# Altium PCB MAKKI_ISMAIL_ESPS3_CAM.PcbDoc
Units mil, origin at the board's own origin, x right, y up, seen from the top; angles counter-clockwise.
Board outline 2454.22 x 2250 mil, 2 copper layers (Top, Bottom); 74 components, 64 nets, 285 pads, 72 vias.
Unrouted connection lines stored in the file: 1.
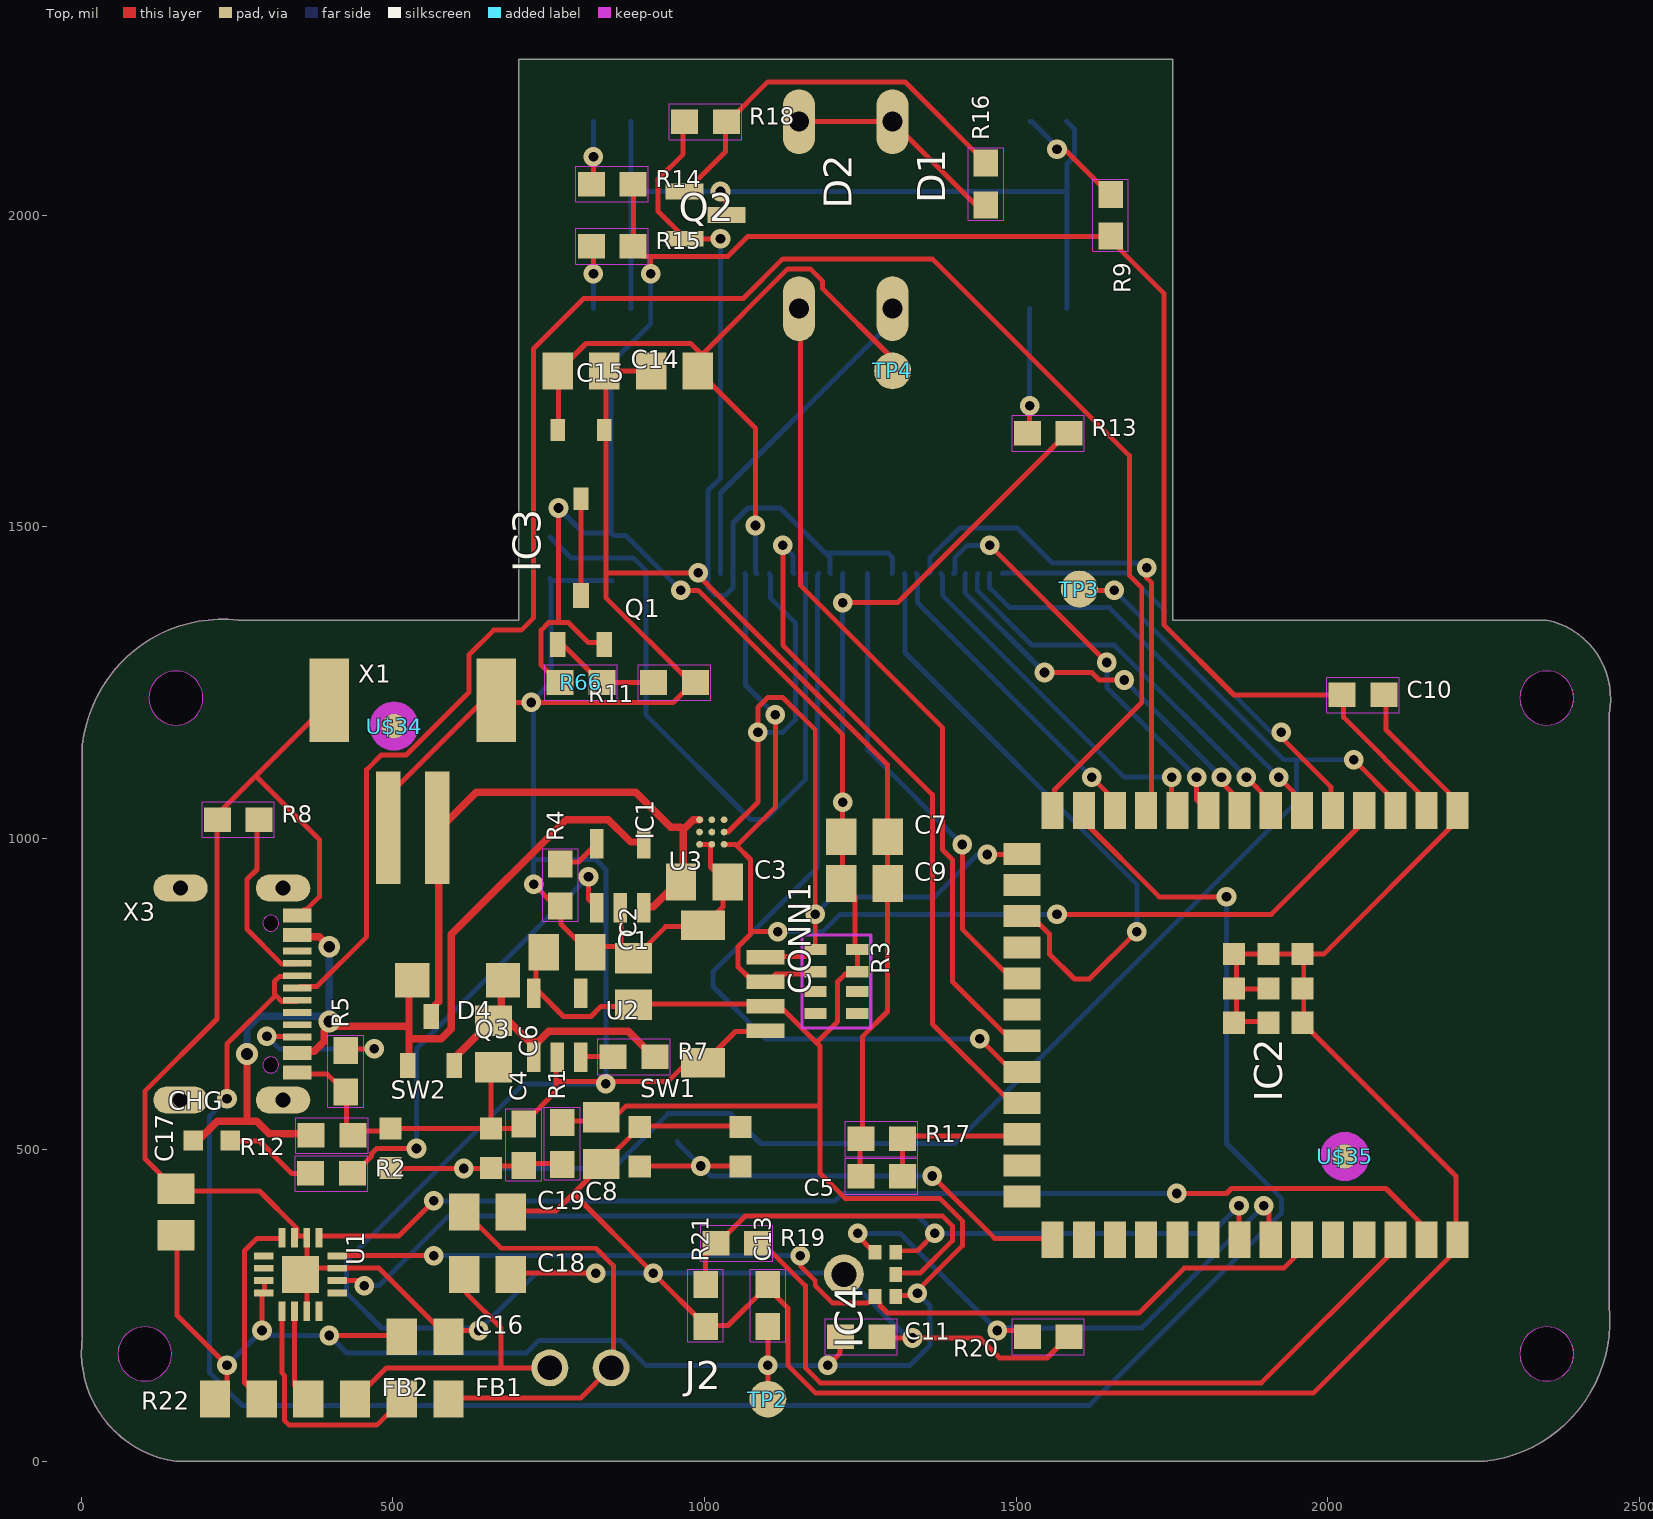
[diagram p0: Top view]
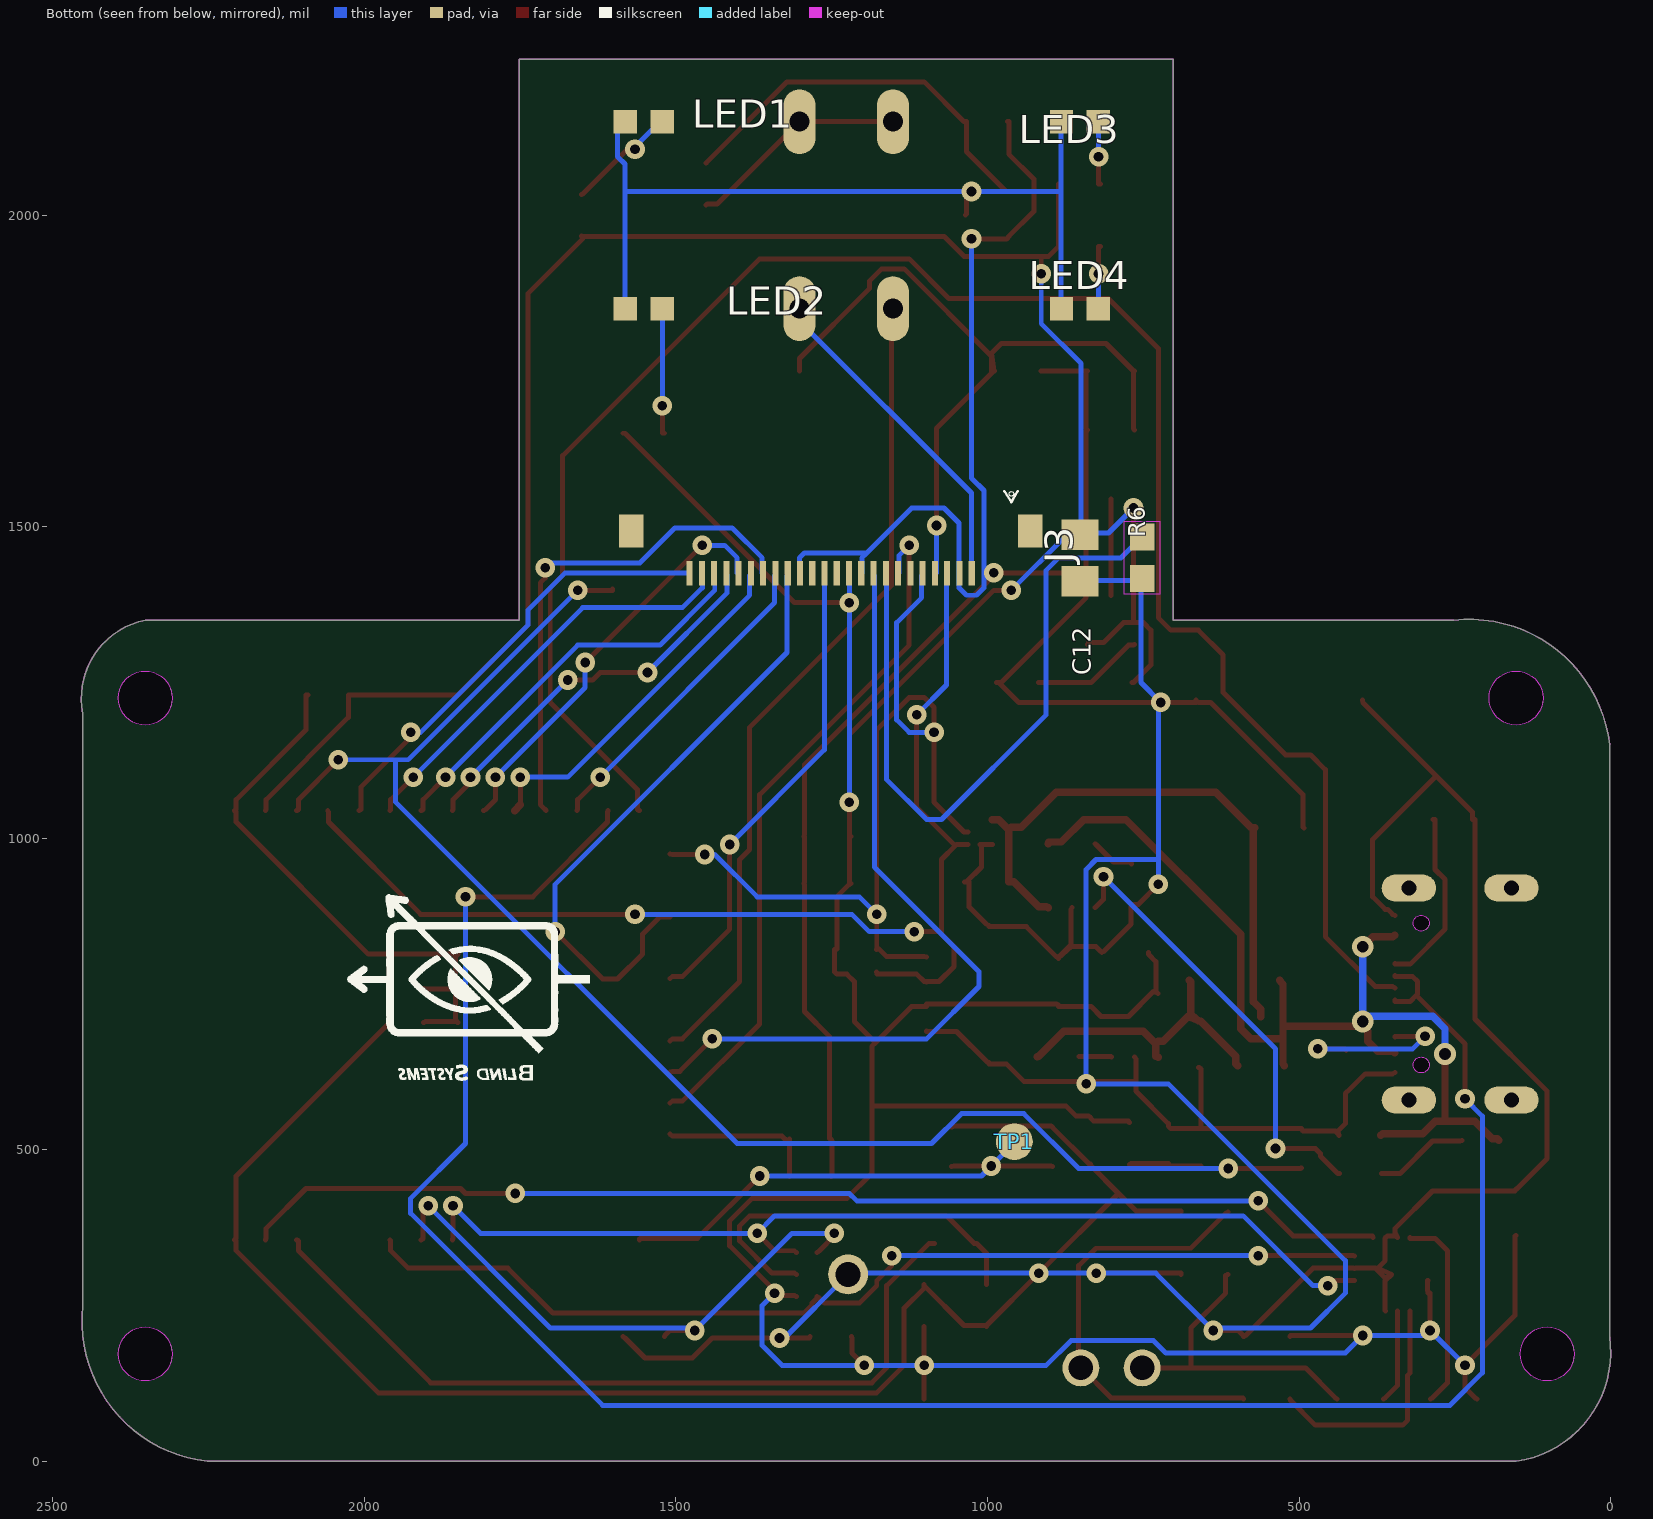
[diagram p1: Bottom view, seen from below]

## Layer stack, top to bottom
Top Solder: solder mask 0.4, Solder Resist, Dk 3.5
Top: signal copper 1.378
Dielectric 1: dielectric 12.6, FR-4, Dk 4.8
Bottom: signal copper 1.378
Bottom Solder: solder mask 0.4, Solder Resist, Dk 3.5

## Board outline
1751.78,2250 1751.78,1350 2351.78,1350 cw(c2326.78,1225) 2451.78,1200 2451.78,250 cw(c2226.78,225) 2251.78,0 151.78,0 cw(c176.78,175) 1.78,200 1.78,1150 cw(c226.78,1125) 251.78,1350 701.78,1350 701.78,2250
cut-out: 101.78,129.19 ccw(c101.78,172.5) 145.08,172.5 ccw(c101.78,172.5) 101.78,215.81 ccw(c101.78,172.5) 58.47,172.5 ccw(c101.78,172.5)
cut-out: 151.78,1181.69 ccw(c151.78,1225) 195.08,1225 ccw(c151.78,1225) 151.78,1268.31 ccw(c151.78,1225) 108.47,1225 ccw(c151.78,1225)
cut-out: 2351.78,129.19 ccw(c2351.78,172.5) 2395.08,172.5 ccw(c2351.78,172.5) 2351.78,215.81 ccw(c2351.78,172.5) 2308.47,172.5 ccw(c2351.78,172.5)
cut-out: 2351.78,1181.69 ccw(c2351.78,1225) 2395.08,1225 ccw(c2351.78,1225) 2351.78,1268.31 ccw(c2351.78,1225) 2308.47,1225 ccw(c2351.78,1225)
cut-out: 304.02,850.99 ccw(c304.02,863.78) 316.81,863.78 ccw(c304.02,863.78) 304.02,876.58 ccw(c304.02,863.78) 291.22,863.78 ccw(c304.02,863.78)
cut-out: 304.02,623.42 ccw(c304.02,636.22) 316.81,636.22 ccw(c304.02,636.22) 304.02,649.01 ccw(c304.02,636.22) 291.22,636.22 ccw(c304.02,636.22)

## Design rules (kind name [scope] priority, off if disabled: settings)
BoardOutlineClearance mdCopperDimension [All] p1: gap=10 ignorepadtopadclearanceinfootprint=FALSE except(0: Arc-SplitContinuation Track-SplitContinuation SMDPad-SplitContinuation THPad-SplitContinuation Via-SplitContinuation Fill-SplitContinuation Poly-SplitContinuation Region-SplitContinuation Text-SplitContinuation; 9: Poly-OutlineEdge Poly-CavityEdge Poly-CutoutEdge Poly-SplitBarrior)
Clearance "Clearance (Same Net)" [All] p1: gap=8 ignorepadtopadclearanceinfootprint=FALSE
Clearance [All] p2: gap=8 ignorepadtopadclearanceinfootprint=FALSE
HoleSize HoleSize_For_NetClass_Power [InNetClass('Power')] p1: absolutevalues=TRUE maxlimit=19 minlimit=19 maxpercent=80.000 minpercent=20.000
HoleSize HoleSize_For_NetClass_gnd [InNetClass('gnd')] p2: absolutevalues=TRUE maxlimit=19 minlimit=19 maxpercent=80.000 minpercent=20.000
HoleSize [All] p3: absolutevalues=TRUE maxlimit=100000 minlimit=15.5 maxpercent=80.000 minpercent=20.000
HoleToHoleClearance mdDrill [All] p1: gap=8 allowstackedmicrovias=TRUE
MinimumSolderMaskSliver [All] p1 off: minsoldermaskwidth=10
PasteMaskExpansion Expansion_SMDPaste_OFF [InPadClass('SMDPaste_OFF')] p1: expansion=0
PasteMaskExpansion mlMinCreamFrame [All] p2: expansion=0
PolygonConnect ThermalVias [IsVia] p1: connectstyle=Direct reliefconductorwidth=10 reliefentries=4 polygonreliefangle="90 Angle" airgapwidth=10
PolygonConnect [All] p2: connectstyle=Relief reliefconductorwidth=10 reliefentries=4 polygonreliefangle="90 Angle" airgapwidth=10
RoutingVias [All] p1: holewidth=15.5 width=31.5 viastyle="Through Hole" minholewidth=15.5 minwidth=31.5 maxholewidth=100 maxwidth=100
SolderMaskExpansion Expansion_SMDSolder_OFF [InPadClass('SMDSolder_OFF')] p1: expansion=0 istentingtop=FALSE
SolderMaskExpansion mlMinStopFrame [All] p2: expansion=2 istentingtop=FALSE
Width Width_For_NetClass_Power [InNetClass('Power')] p1: maxlimit=24 minlimit=10 preferedwidth=12
Width Width_For_NetClass_gnd [InNetClass('gnd')] p2: maxlimit=10 minlimit=10 preferedwidth=10
Width [All] p3: maxlimit=10 minlimit=8 preferedwidth=8
26 further rules are at their usual default settings.

## Classes and differential pairs
pad class SMDSolder_OFF: J3-1 J3-2 J3-3 J3-4 J3-5 J3-6 J3-7 J3-8 J3-9 J3-10 J3-11 J3-12 J3-13 J3-14 J3-15 J3-16 J3-17 J3-18 J3-19 J3-20 J3-21 J3-22 J3-23 J3-24 U1-1 U1-2 U1-3 U1-4 U1-5 U1-6 U1-7 U1-8 U1-9 U1-10 U1-11 U1-12 U1-13 U1-14 U1-15 U1-16
pad class SMDPaste_OFF: TP1-P$1 TP2-P$1 TP3-P$1 TP4-P$1 U1-THERMAL U$34-1 U$35-1
net class Power: VBAT VBUS VHI

## Components (designator, comment, footprint, x,y, rotation, side; value= is the part's Value field where it differs from the comment)
C1 "10uF" 0805-NO 779.28,817 r0 top
C2 "10uF" 0805-NO 886.28,770 r90 top
C3 "10µF" 0805-NO 999.78,930 r0 top
C4 "1uF" 0603-NO 709.78,508 r90 top
C5 "1uF" 0603-NO 1284.28,457.5 r180 top
C6 "10µF" 0805-NO 661.35,669.8 r270 top
C7 "10uF" 0805-NO 1256.78,1002.5 r0 top
C8 "10µF" 0805-NO 834.37,514.64 r270 top
C9 "10uF" 0805-NO 1256.78,927.5 r0 top
C10 "1uF" 0603-NO 2056.78,1230 r0 top
C11 "0.1uF" 0603-NO 1251.78,200 r0 top
C12 "100pF" 0805-NO 851.78,1450 r270 bottom
C13 "1uF" 0603-NO 1101.78,250 r90 top
C14 "10µF" 0805-NO 801.78,1750 r0 top
C15 "100pF" 0805-NO 951.78,1750 r180 top
C16 "0.1uF" 0805-NO 551.78,200 r0 top
C17 "10uF" 0805-NO 151.78,400 r90 top
C18 "220pF" 0805-NO 651.78,300 r0 top
C19 "220pF" 0805-NO 651.78,400 r0 top
CHG "ORANGE" CHIPLED_0603_NOOUTLINE 209.28,515 r270 top
CONN1 "JST SH" JST_SH4_RA 1031.78,750 r270 top
D1 "1N4148DO35-7" DO35-7 1301.78,2000 r270 top
D2 "1N4148DO35-7" DO35-7 1151.78,2000 r270 top
D4 "MBR540" SOD-123 603.78,772 r180 top
FB1 "Ferrite" 0805-NO 551.78,100 r0 top
FB2 "Ferrite" 0805-NO 401.78,100 r0 top
IC1 "LC709203F/MH" WLCSP9 1011.78,1010 r90 top
IC2 "ESP32-S3-WROOM-1-N16R8" ESP32S3WROOM1N16R8 2001.78,700 r270 top
IC3 "XC6206P282MR-G" SOT95P280X130-3N 801.78,1600 r270 top
IC4 "" SPH0645LM4H 1251.78,300 r270 top
J2 "B2B-XH-A" B2B-XH-A 751.78,150 r0 top
J3 "XF2L-2435-1" XF2L-2435-1 1251.78,1500 r270 bottom
LED1 "150060SS75000" LEDC1608X80N 1551.78,2150 r180 bottom
LED2 "150060SS75000" LEDC1608X80N 1551.78,1850 r180 bottom
LED3 "150060SS75000" LEDC1608X80N 851.78,2150 r180 bottom
LED4 "150060SS75000" LEDC1608X80N 851.78,1850 r180 bottom
Q1 "DMG3415U" SOT23-R 801.78,1350 r0 top
Q2 "2N7002" SOT96P240X120-3N 1001.78,2000 r0 top
Q3 "DMG3415U" SOT23-R 561.28,674.5 r0 top
R1 "5.1K" 0603-NO 771.78,510 r90 top
R2 "5.1K" 0603-NO 401.28,462 r0 top
R3 "10K" RESPACK_4X0603 1211.78,770 r270 top
R4 "5.1K" 0603-NO 768.78,925 r90 top
R5 "5.1K" 0603-NO 424.28,626 r90 top
R6 "1K" 0603-NO 751.78,1450 r90 bottom
R7 "100K" 0603-NO 886.78,649.5 r0 top
R8 "5.1K" 0603-NO 251.78,1030 r0 top
R9 "0.12 K" 0603-NO 1651.78,2000 r270 top
R11 "1K" 0603-NO 951.78,1250 r180 top
R12 "100K" 0603-NO 402.28,523 r180 top
R13 "0.12 K" 0603-NO 1551.78,1650 r0 top
R14 "0.12 K" 0603-NO 851.78,2050 r0 top
R15 "0.12 K" 0603-NO 851.78,1950 r0 top
R16 "1K" 0603-NO 1451.78,2050 r90 top
R17 "1Meg" 0603-NO 1284.28,517.5 r0 top
R18 "1K" 0603-NO 1001.78,2150 r0 top
R19 "68" 0603-NO 1051.78,350 r0 top
R20 "47K" 0603-NO 1551.78,200 r180 top
R21 "47K" 0603-NO 1001.78,250 r90 top
R22 "1M" 0805-NO 251.78,100 r180 top
R66 "10K" 0603-NO 801.78,1250 r180 top
SW1 "KMR2" BTN_KMR2_4.6X2.8 976.78,505 r0 top
SW2 "KMR2" BTN_KMR2_4.6X2.8 576.78,502.5 r0 top
TP1 "" TESTPOINT_ROUND_1.5MM_NO 956.78,513 r180 bottom
TP2 "" TESTPOINT_ROUND_1.5MM_NO 1101.78,100 r0 top
TP3 "" TESTPOINT_ROUND_1.5MM_NO 1601.78,1400 r0 top
TP4 "" TESTPOINT_ROUND_1.5MM_NO 1301.78,1750 r0 top
U1 "MAX98357A" QFN16_3MM 351.78,300 r270 top
U2 "AP2112/RT9080-3.3" SOT23-5 763.78,700 r0 top
U3 "MCP73831T-2ACI/OT" SOT23-5 864.78,940 r0 top
U$34 "" FIDUCIAL_1MM 501.78,1180 r270 top
U$35 "" FIDUCIAL_1MM 2027.64,489.28 r270 top
X1 "JSTPH" JSTPH2_BATT 531.78,1162.5 r0 top
X3 "USB C" USB_C_CUSB31-CFM2AX-01-X 206.78,750 r270 top

## Footprints (in the part's own frame and the unit in brackets; to place one, negate y for a bottom-side part, rotate by r counter-clockwise, add the part's x,y. Pads: shape width x height; smd on the part's side, far side on the other; paste and mask are expansions set on the pad)
0603-NO [mm] "0603-NO"
  rect 1.1x1 smd: 1(-0.85,0) 2(0.85,0)
  Top keep-out lines w0.051: -1.473,0.729 -1.473,-0.729 1.473,-0.729 1.473,0.729 -1.473,0.729
0805-NO [mil] "0805-NO"
  rect 48.82x59.06 smd: 1(-37.4,0) 2(37.4,0)
B2B-XH-A [mm] "B2B-XH-A"
  round 1.508 hole 1: 1(0,0) 2(2.5,0)
BTN_KMR2_4.6X2.8 [mil] "BTN_KMR2_4.6X2.8"
  rect 35.43x35.43 smd: A(80.71,31.5) A'(-80.71,31.5) B(80.71,-31.5) B'(-80.71,-31.5)
CHIPLED_0603_NOOUTLINE [mil] "CHIPLED_0603_NOOUTLINE"
  rect 31.5x31.5 smd: A(0,-29.53) C(0,29.53)
DO35-7 [mil] "DO35-7"
  oval 104x52 hole 32: A(150,0) C(-150,0)
ESP32S3WROOM1N16R8 [mm] "ESP32S3WROOM1N16R8"
  rect 1.5x0.9 smd: 1(-8.75,5.26) 2(-8.75,3.99) 3(-8.75,2.72) 4(-8.75,1.45) 5(-8.75,0.18) 6(-8.75,-1.09) 7(-8.75,-2.36) 8(-8.75,-3.63) 9(-8.75,-4.9) 10(-8.75,-6.17) 11(-8.75,-7.44) 12(-8.75,-8.71) 13(-8.75,-9.98) 14(-8.75,-11.25) 27(8.75,-11.25) 28(8.75,-9.98) 29(8.75,-8.71) 30(8.75,-7.44) 31(8.75,-6.17) 32(8.75,-4.9) 33(8.75,-3.63) 34(8.75,-2.36) 35(8.75,-1.09) 36(8.75,0.18) 37(8.75,1.45) 38(8.75,2.72) 39(8.75,3.99) 40(8.75,5.26)
  rect 0.9x1.5 smd: 15(-6.985,-12.5) 16(-5.715,-12.5) 17(-4.445,-12.5) 18(-3.175,-12.5) 19(-1.905,-12.5) 20(-0.635,-12.5) 21(0.635,-12.5) 22(1.905,-12.5) 23(3.175,-12.5) 24(4.445,-12.5) 25(5.715,-12.5) 26(6.985,-12.5)
  rect 0.9x0.9 smd: 41(-1.5,-2.46) 42(-2.9,-1.06) 43(-2.9,-2.46) 44(-2.9,-3.86) 45(-1.5,-3.86) 46(-0.1,-3.86) 47(-0.1,-2.46) 48(-0.1,-1.06) 49(-1.5,-1.06)
FIDUCIAL_1MM [mm] "FIDUCIAL_1MM"
  rrect100% 1x1 smd paste+0: 1(0,0)
  Top keep-out lines w0.483: 0,-0.75 cw(c0,0) -0.75,0 cw(c0,0) 0,0.75 cw(c0,0) 0.75,0 cw(c0,0) 0,-0.75
  Top keep-out lines w0.5: 0,-0.75 cw(c0,0) -0.75,0 cw(c0,0) 0,0.75 cw(c0,0) 0.75,0 cw(c0,0) 0,-0.75
JST_SH4_RA [mil] "JST_SH4_RA"
  rect 23.62x61.02 smd: 1(59.06,66.38) 2(19.69,66.38) 3(-19.69,66.38) 4(-59.06,66.38)
  rect 47.24x70.87 smd: MT1(-110.24,-33.94) MT2(110.24,-33.94)
JSTPH2_BATT [mm] "JSTPH2_BATT"
  rect 1x4.6 smd: 1(-1,-3.7) 2(1,-3.7)
  rect 1.6x3.4 smd: NC1(-3.4,1.5) NC2(3.4,1.5)
LEDC1608X80N [mil] "LEDC1608X80N"
  rect 37.4x37.4 smd: 1(-29.53,0) 2(29.53,0)
QFN16_3MM [mil] "QFN16_3MM"
  rect 31.5x11.02 smd mask+0: 1(-59.06,29.53) 2(-59.06,9.84) 3(-59.06,-9.84) 4(-59.06,-29.53) 9(59.06,-29.53) 10(59.06,-9.84) 11(59.06,9.84) 12(59.06,29.53)
  rect 11.02x31.5 smd mask+0: 5(-29.53,-59.06) 6(-9.84,-59.06) 7(9.84,-59.06) 8(29.53,-59.06) 13(29.53,59.06) 14(9.84,59.06) 15(-9.84,59.06) 16(-29.53,59.06)
  rect 59.06x59.06 smd paste+0: THERMAL(0,0)
RESPACK_4X0603 [mil] "RESPACK_4X0603"
  rect 17.72x35.43 smd: 1(-51.18,-33.46) 2(-15.75,-33.46) 3(15.75,-33.46) 4(51.18,-33.46) 5(51.18,33.46) 6(15.75,33.46) 7(-15.75,33.46) 8(-51.18,33.46)
  Top keep-out lines w5: 74.8,-55.12 -74.8,-55.12 -74.8,55.12 74.8,55.12 74.8,-55.12
SOD-123 [mil] "SOD-123"
  rect 55.12x55.12 smd: A(72.83,0) C(-72.83,0)
SOT23-5 [mil] "SOT23-5"
  rect 21.65x47.24 smd: 1(-37.4,-51.19) 2(0,-51.19) 3(37.4,-51.19) 4(37.4,51.19) 5(-37.4,51.19)
SOT23-R [mil] "SOT23-R"
  rect 25x40 smd: 1(-37.4,-39.37) 2(37.4,-39.37) 3(0,39.37)
SOT95P280X130-3N [mil] "SOT95P280X130-3N"
  rect 35.43x23.62 smd: 1(-55.12,37.4) 2(-55.12,-37.4) 3(55.12,0)
SOT96P240X120-3N [mm] "SOT96P240X120-3N"
  rect 1.55x0.65 smd: 1(-0.85,0.96) 2(-0.85,-0.96) 3(0.85,0)
SPH0645LM4H [mm] "SPH0645LM4H"
  rect 0.6x0.525 smd: 1(-0.9,1.4) 2(-0.9,0.55) 4(0.9,0.55) 5(0.9,1.4) 6(0,1.4)
  round 1.625 hole 1.025: 3(0,-0.71)
TESTPOINT_ROUND_1.5MM_NO [mil] "TESTPOINT_ROUND_1.5MM_NO"
  rrect100% 59.06x59.06 smd paste+0: P$1(0,0)
USB_C_CUSB31-CFM2AX-01-X [mil] "USB_C_CUSB31-CFM2AX-01-X"
  rect 22.64x45.28 smd: A1B12(-125.98,139.57) A4B9(-94.49,139.57) B1A12(125.98,139.57) B4A9(94.49,139.57)
  rect 10.83x45.28 smd: A5(-49.21,139.57) A6(-9.84,139.57) A7(9.84,139.57) A8(49.21,139.57) B5(68.9,139.57) B6(29.53,139.57) B7(-29.53,139.57) B8(-68.9,139.57)
  oval 43.62x87.24 hole 23.62: M1(-170.08,116.93) M2(170.08,116.93) M3(-170.08,-47.64) M4(170.08,-47.64)
WLCSP9 [mil] "WLCSP9"
  rrect100% 10.83x10.83 smd: A1(-19.69,19.69) A2(0,19.69) A3(19.69,19.69) B1(-19.69,0) B2(0,0) B3(19.69,0) C1(-19.69,-19.69) C2(0,-19.69) C3(19.69,-19.69)
XF2L-2435-1 [mm] "XF2L-2435-1"
  rect 1x0.25 smd mask+0: 1(1.905,5.75) 2(1.905,5.25) 3(1.905,4.75) 4(1.905,4.25) 5(1.905,3.75) 6(1.905,3.25) 7(1.905,2.75) 8(1.905,2.25) 9(1.905,1.75) 10(1.905,1.25) 11(1.905,0.75) 12(1.905,0.25) 13(1.905,-0.25) 14(1.905,-0.75) 15(1.905,-1.25) 16(1.905,-1.75) 17(1.905,-2.25) 18(1.905,-2.75) 19(1.905,-3.25) 20(1.905,-3.75) 21(1.905,-4.25) 22(1.905,-4.75) 23(1.905,-5.25) 24(1.905,-5.75)
  rect 1.34x1 smd: M1(0.18,8.137) M2(0.18,-8.137)
  silkscreen extent -1.44,7.08 -1,7.62

## Part data
C1 C2 C3 C6 C7 C8 C9 C12 C14 C15 C16 C17 C18 C19 FB1 FB2 R22: library part 0805-NO, PackageName=0805-NO
C4 C5 C10 C11 C13 R1 R2 R4 R5 R6 R7 R8 R9 R11 R12 R13 R14 R15 R16 R17 R18 R19 R20 R21 R66: library part 0603-NO, PackageName=0603-NO
CHG: library part CHIPLED_0603_NOOUTLINE, PackageName=CHIPLED_0603_NOOUTLINE
CONN1: library part JST_SH4_RA, PackageName=JST_SH4_RA
D1 D2: library part DO35-7, PackageName=DO35-7
D4: library part SOD-123, PackageName=SOD-123
IC1: library part WLCSP9, PackageName=WLCSP9
IC2: library part ESP32S3WROOM1N16R8, PackageName=ESP32S3WROOM1N16R8
IC3: library part SOT95P280X130-3N, PackageName=SOT95P280X130-3N
IC4: library part SPH0645LM4H, PackageName=SPH0645LM4H
LED1 LED2 LED3 LED4: library part LEDC1608X80N, PackageName=LEDC1608X80N
Q1 Q3: library part SOT23-R, PackageName=SOT23-R
Q2: library part SOT96P240X120-3N, PackageName=SOT96P240X120-3N
R3: library part RESPACK_4X0603, PackageName=RESPACK_4X0603
SW1 SW2: library part BTN_KMR2_4.6X2.8, PackageName=BTN_KMR2_4.6X2.8
TP1 TP2 TP3 TP4: library part TESTPOINT_ROUND_1.5MM_NO, PackageName=TESTPOINT_ROUND_1.5MM_NO
U1: library part QFN16_3MM, PackageName=QFN16_3MM
U2 U3: library part SOT23-5, PackageName=SOT23-5
U$34 U$35: library part FIDUCIAL_1MM, PackageName=FIDUCIAL_1MM
X1: library part JSTPH2_BATT, PackageName=JSTPH2_BATT
X3: library part USB_C_CUSB31-CFM2AX-01-X, PackageName=USB_C_CUSB31-CFM2AX-01-X
J2: PackageName=B2B-XH-A
J3: PackageName=XF2L-2435-1

## Free pads (board coordinates)
  round 25.59 hole 25.59 unplated: MH1(304.02,636.22) MH2(304.02,863.78)
  round 86.61 hole 86.61 unplated: MH1(2351.78,172.5) MH2(2351.78,1225) MH3(101.78,172.5) MH4(151.78,1225)

## Via types
v1: diameter 31.5/31.5 (per signal layer), hole 15.5, Top to Bottom, 69 vias
v2: diameter 35/35 (per signal layer), hole 19, Top to Bottom, 3 vias

## Nets (pads, with @x,y where several pads share a name; then routed paths per layer and width w, separated by ;. In a path a pad name is that pad's centre, name@x,y a point inside that pad or via, vN(x,y) a via of type N, cw(c..) or ccw(c..) an arc to the next point about the centre after c; other vN are vias at no path point)
1.8V: IC2.25
2.8V: C14.1 C15.1 IC3.2 J3.4 TP4.P$1 | length 1224.7
  Top w8: IC3.2 765.78,1658 C14.1@765.78,1750 ; C14.1 C14.1@765.78,1750 ; v1(1081.78,1502) 1081.78,1658 989.78,1750 C15.1 ; TP4.P$1 1301.78,1770 1189.78,1882 1189.78,1894 1169.78,1914 1133.78,1914 993.78,1774 993.78,1750 C15.1 ; C14.1@765.78,1750 809.78,1794 977.78,1794 993.78,1778 C15.1
  Bottom w8: v1(1081.78,1502) 1081.78,1426 J3.4
3.3V: C1.1 C2.1 C7.1 C8.1 C9.1 C10.1 C11.1 C12.1 C13.1 C16.1 C17.1 CONN1.2 IC2.2 IC4.5 J3.11 Q1.2 R1.2 R3.7 R3.8 R9.2 R13.2 R14.2 R15.2 R22.2 R66.2 TP2.P$1 U1.7 U1.8 U2.5 | length 8642.3
  Top w8: C17.1 153.78,362 153.78,234 v1(233.78,154) 233.78,118 217.78,102 R22.2 ; v1(289.78,210) 289.78,270 U1.8 293.78,274 293.78,290 U1.7 ; v1(397.78,202) 513.78,202 C16.1 ; C1.1 741.78,814 729.78,802 729.78,754 U2.5 733.78,754 773.78,714 817.78,714 833.78,730 885.78,730 C2.1 889.78,734 1097.78,734 CONN1.2 1101.78,730 1121.78,730 1179.78,672 ; v1(765.78,1530) 765.78,1346 ; R66.2 765.78,1250 737.78,1278 737.78,1334 749.78,1346 765.78,1346 ; R1.2 773.78,546 829.78,546 833.78,550 C8.1 837.78,554 857.78,554 873.78,570 1185.78,570 ; Q1.2 837.78,1314 813.78,1314 781.78,1346 765.78,1346 ; R15.2 R15.2@885.78,1950 ; R14.2 885.78,2050 R15.2@885.78,1950 ; v1(913.78,1906) 913.78,1934 ; v1(961.78,1398) 989.78,1398 1221.78,1166 v1(1221.78,1058) 1221.78,1006 C7.1 1221.78,1002 1221.78,930 C9.1 1221.78,926 1241.78,906 1241.78,822 R3.8 1245.78,818 1245.78,786 R3.7 1241.78,782 1225.78,782 1213.78,770 1213.78,706 1179.78,672 ; TP2.P$1 v1(1101.78,154) C13.1 ; v1(1197.78,154) 1217.78,174 1217.78,198 C11.1 ; v1(1221.78,1378) 1309.78,1378 1581.78,1650 R13.2 ; IC4.5 1309.78,266 1333.78,266 v1@1339.78,272 ; v1(1341.78,270) v1@1339.78,272 ; IC2.2 2157.78,1046 2157.78,1062 2025.78,1194 2025.78,1230 C10.1 1849.78,1230 1737.78,1342 1737.78,1874 1649.78,1962 R9.2 1649.78,1966 1069.78,1966 1037.78,1934 913.78,1934 ; R15.2@885.78,1950 901.78,1934 913.78,1934 ; 1179.78,672 1185.78,666 1185.78,570 ; 1185.78,570 1185.78,462 1225.78,422 1377.78,422 1413.78,386 1413.78,346 v1@1339.78,272
  Bottom w8: v1(233.78,154) v1(289.78,210) 285.78,202 v1(397.78,202) 425.78,174 713.78,174 733.78,194 865.78,194 905.78,154 v1(1101.78,154) v1(1197.78,154) 1329.78,154 1361.78,186 1361.78,250 v1(1341.78,270) ; v1(765.78,1530) 805.78,1490 849.78,1490 C12.1 ; v1(913.78,1906) 913.78,1826 849.78,1762 849.78,1494 C12.1 ; v1(961.78,1398) 873.78,1486 853.78,1486 C12.1 ; v1(1221.78,1058) v1(1221.78,1378) 1221.78,1422 J3.11
BCLK: IC2.35 IC4.4 U1.16 | length 1670.5
  Top w8: U1.16 413.78,330 v1(565.78,330) ; v1(1153.78,330) 1153.78,314 1177.78,290 1177.78,282 1205.78,254 1261.78,254 1269.78,262 IC4.4 1273.78,262 1281.78,254 1281.78,250 1293.78,238 1697.78,238 1769.78,310 1929.78,310 1957.78,338 1957.78,354 IC2.35
  Bottom w8: v1(565.78,330) v1(1153.78,330)
BOOT0: IC2.27 SW1.B SW1.B' TP1.P$1 | length 830.4
  Top w8: SW1.B' 897.78,474 v1(993.78,474) 1053.78,474 SW1.B ; v1(1365.78,458) 1465.78,358 1557.78,358 IC2.27
  Bottom w8: TP1.P$1 957.78,510 v1(993.78,474) 1009.78,458 v1(1365.78,458)
COMMAND: D2.A IC2.21 | length 1334.1
  Top w8: D2.A 1153.78,1850 1153.78,1406 1381.78,1178 1381.78,982 1397.78,966 1397.78,770 1489.78,678 1505.78,678 IC2.21
D0: IC2.5 J3.24 | length 728.4
  Top w8: v1(1925.78,1170) 1925.78,1162 2005.78,1082 2005.78,1046 IC2.5
  Bottom w8: J3.24 1481.78,1426 1677.78,1426 1737.78,1366 1737.78,1342 1909.78,1170 v1(1925.78,1170)
D1: IC2.6 J3.23 | length 681.8
  Top w8: v1(1921.78,1098) 1957.78,1062 1957.78,1046 IC2.6
  Bottom w8: J3.23 1457.78,1422 1457.78,1402 1489.78,1370 1649.78,1370 v1(1921.78,1098)
D2: IC2.10 J3.19 | length 581.9
  Top w8: IC2.10@1749.78,1054 v1(1749.78,1098)
  Top w12: IC2.10@1749.78,1054 1749.78,1053.57 IC2.10
  Bottom w8: J3.19 1381.78,1422 1381.78,1390 1673.78,1098 v1(1749.78,1098)
D3: IC2.8 J3.21 | length 631.3
  Top w8: v1(1545.78,1266) 1621.78,1266 1633.78,1254 v1(1673.78,1254) ; v1(1829.78,1098) 1829.78,1090 1857.78,1062 1857.78,1046 IC2.8
  Bottom w8: J3.21 1417.78,1422 1417.78,1394 v1(1545.78,1266) ; v1(1673.78,1254) v1(1829.78,1098)
D4: IC2.7 J3.22 | length 653.8
  Top w8: v1(1869.78,1098) 1905.78,1062 1905.78,1046 IC2.7
  Bottom w8: J3.22 1437.78,1422 1437.78,1398 1525.78,1310 1657.78,1310 v1(1869.78,1098)
D5: IC2.9 J3.20 | length 662.4
  Top w8: v1(1457.78,1470) v1(1645.78,1282) ; v1(1789.78,1098) 1789.78,1062 1805.78,1046 IC2.9
  Bottom w8: J3.20 1401.78,1426 1401.78,1450 1421.78,1470 v1(1457.78,1470) ; v1(1645.78,1282) 1645.78,1242 v1(1789.78,1098)
D6: IC2.11 J3.18 | length 816.8
  Top w8: IC2.11 1709.78,1046 1717.78,1054 1717.78,1410 1709.78,1418 v1(1709.78,1434)
  Bottom w8: J3.18 1361.78,1426 1361.78,1450 1409.78,1498 1501.78,1498 1557.78,1442 1701.78,1442 v1(1709.78,1434)
D7: IC2.17 J3.16 | length 1005.9
  Top w8: IC2.17 1509.78,874 1525.78,874 1553.78,846 1553.78,814 1593.78,774 1617.78,774 v1(1693.78,850)
  Bottom w8: J3.16 1321.78,1422 1321.78,1298 1693.78,926 v1(1693.78,850)
D8: IC2.18
D9: IC2.20
D+: IC2.14 X3.A6 X3.B6 | length 3033.5
  Top w8: X3.A6 349.78,762 377.78,762 457.78,842 457.78,1110 481.78,1134 521.78,1134 621.78,1234 621.78,1294 661.78,1334 705.78,1334 725.78,1354 725.78,1786 805.78,1866 1061.78,1866 1125.78,1930 1365.78,1930 1681.78,1614 1681.78,1422 1701.78,1402 1701.78,1218 1561.78,1078 1561.78,1046 IC2.14
D-: IC2.13 X3.A7 X3.B7 | length 3464
  Top w8: v1(233.78,582) 233.78,670 311.78,748 ; X3.A7 345.78,738 321.78,738 311.78,748 ; X3.B7 345.78,778 317.78,778 309.78,770 309.78,750 311.78,748 ; IC2.13 1609.78,1042 1609.78,1026 1729.78,906 v1(1837.78,906)
  Bottom w8: v1(233.78,582) 205.78,554 205.78,142 257.78,90 1617.78,90 1925.78,398 1925.78,422 1837.78,510 v1(1837.78,906)
DATA: IC2.38 R19.2 | length 1297.9
  Top w8: R19.2 1093.78,350 1161.78,282 1161.78,150 1185.78,126 1893.78,126 2105.78,338 2105.78,354 IC2.38
DIN: IC2.39 U1.1 | length 1855.7
  Top w8: U1.1 381.78,362 509.78,362 v1(565.78,418) ; v1(1757.78,430) 1837.78,430 1845.78,438 2093.78,438 2157.78,374 2157.78,358 IC2.39
  Bottom w8: v1(565.78,418) 1209.78,418 1221.78,430 v1(1757.78,430)
EN: R7.1 U2.3 | length 52.9
  Top w8: U2.3 801.78,650 849.78,650 R7.1
GND: C1.2 C2.2 C3.2 C4.2 C5.2 C6.2 C7.2 C8.2 C9.2 C10.2 C11.2 C12.2 C13.2 C14.2 C15.2 C16.2 C17.2 C18.2 C19.2 CONN1.1 CONN1.MT1 CONN1.MT2 IC1.A1 IC1.B1 IC2.1 IC2.40 IC2.41 IC2.42 IC2.43 IC2.44 IC2.45 IC2.46 IC2.47 IC2.48 IC2.49 IC3.1 IC4.3 J3.2 J3.10 J3.15 Q2.2 R4.1 R5.1 R6.1 R8.1 R11.1 R12.1 R17.1 R18.1 R20.1 R21.1 SW1.A SW1.A' SW2.A SW2.A' U1.2 U1.3 U1.11 U1.15 U1.THERMAL U2.2 U3.2 X1.1 X1.NC1 X1.NC2 X3.A1B12 X3.B1A12 | length 14408.7
  Top w8: X3.B1A12 349.78,622 393.78,622 421.78,594 R5.1 425.78,590 425.78,542 437.78,530 R12.1 437.78,526 441.78,530 493.78,530 SW2.A' 497.78,534 653.78,534 SW2.A ; X3.A1B12 349.78,878 357.78,886 361.78,886 381.78,906 381.78,998 279.78,1100 ; U1.11 361.78,242 361.78,290 U1.THERMAL ; X1.NC1 397.78,1218 279.78,1100 ; X1.1 493.78,1018 493.78,1070 641.78,1218 661.78,1218 X1.NC2 665.78,1218 v1(721.78,1218) 949.78,1218 981.78,1250 R11.1 977.78,1250 841.78,1386 841.78,1426 ; v1(637.78,210) 597.78,210 589.78,202 C16.2 585.78,202 477.78,310 413.78,310 U1.15 409.78,310 401.78,310 377.78,310 361.78,294 U1.THERMAL ; C6.2 657.78,630 657.78,538 SW2.A ; C18.2 689.78,302 v1(825.78,302) ; C19.2 689.78,402 761.78,402 789.78,430 ; v1(725.78,926) 757.78,894 765.78,894 R4.1 769.78,890 769.78,862 813.78,818 C1.2 817.78,818 825.78,826 865.78,826 C2.2 ; U2.2 761.78,646 761.78,610 ; C14.2 C14.2@841.78,1750 ; v1(841.78,606) v1@841.78,610 ; U3.2 865.78,886 865.78,830 885.78,810 C2.2 ; C15.2 C14.2@841.78,1750 ; R18.1 965.78,2150 965.78,2098 925.78,2058 925.78,2006 965.78,1966 Q2.2 969.78,1962 v1(1025.78,1962) ; v1(989.78,1426) v1@987.78,1424 ; IC1.A1 993.78,990 1009.78,990 IC1.B1 1009.78,986 1009.78,954 1033.78,930 C3.2 1029.78,930 1029.78,890 1001.78,862 CONN1.MT1 997.78,858 937.78,858 889.78,810 C2.2 ; R21.1 R21.1@1001.78,218 ; SW1.A 1053.78,538 897.78,538 SW1.A' 893.78,534 837.78,478 C8.2 833.78,474 789.78,430 ; CONN1.1 1097.78,690 1049.78,690 1001.78,642 CONN1.MT2 997.78,638 969.78,638 941.78,610 v1@841.78,610 ; C5.2 1249.78,458 1249.78,514 R17.1 1253.78,518 1253.78,682 1293.78,722 1293.78,926 C9.2 1293.78,930 1293.78,1002 C7.2 1293.78,1006 1293.78,1118 v1@987.78,1424 ; C11.2 1285.78,198 v1(1333.78,198) 1441.78,198 1473.78,166 1549.78,166 1581.78,198 R20.1 ; IC2.47 1901.78,706 1853.78,706 IC2.46 1853.78,710 1853.78,754 IC2.45 ; IC2.41 1901.78,758 1853.78,758 IC2.45 ; C10.2 2093.78,1230 2093.78,1174 2205.78,1062 2205.78,1046 IC2.1 2205.78,1042 2205.78,1026 1993.78,814 1965.78,814 IC2.42 ; 279.78,1100 221.78,1042 221.78,1030 R8.1 217.78,1030 217.78,710 101.78,594 101.78,486 149.78,438 C17.2 153.78,434 285.78,434 345.78,374 345.78,366 U1.3 345.78,362 357.78,362 U1.2 361.78,358 361.78,322 373.78,310 U1.THERMAL ; SW2.A 657.78,534 705.78,534 709.78,538 C4.2 709.78,542 761.78,594 761.78,610 ; 761.78,610 v1@841.78,610 ; 789.78,430 v1(917.78,302) R21.1@1001.78,218 ; 841.78,1426 985.78,1426 v1@987.78,1424 ; 841.78,1426 841.78,1654 IC3.1 841.78,1658 C14.2@841.78,1750 ; R21.1@1001.78,218 1037.78,218 1101.78,282 C13.2 1101.78,278 1133.78,246 1133.78,154 1177.78,110 1977.78,110 2205.78,338 2205.78,354 IC2.40 2205.78,358 2205.78,458 1961.78,702 IC2.48 1961.78,706 1961.78,758 IC2.49 1961.78,762 1961.78,814 IC2.42 ; IC2.45 1853.78,762 1853.78,810 IC2.44 1853.78,814 1901.78,814 IC2.43 1905.78,814 1957.78,814 IC2.42
  Bottom w8: v1(725.78,926) 725.78,966 ; C12.2 849.78,1414 753.78,1414 R6.1 753.78,1410 753.78,1250 v1(721.78,1218) 725.78,1218 725.78,966 ; v1(989.78,1426) 1005.78,1426 ; v1(1025.78,1962) 1025.78,1578 1005.78,1558 1005.78,1426 ; J3.10 1201.78,1426 1201.78,1450 1195.78,1456 ; J3.15 1301.78,1426 1301.78,1450 1293.78,1458 1197.78,1458 1195.78,1456 ; v1(1333.78,198) 1325.78,198 1225.78,298 IC4.3 1221.78,302 v1(917.78,302) v1(825.78,302) 729.78,302 v1(637.78,210) 637.78,214 481.78,214 425.78,270 425.78,322 709.78,606 v1(841.78,606) 841.78,950 825.78,966 725.78,966 ; 1005.78,1426 1005.78,1402 1017.78,1390 1033.78,1390 1045.78,1402 1045.78,1422 J3.2 1045.78,1426 1045.78,1506 1069.78,1530 1121.78,1530 1195.78,1456
HREF: IC2.22 J3.9 | length 1285.1
  Top w8: v1(1441.78,678) 1493.78,626 1505.78,626 IC2.22
  Bottom w8: J3.9 1181.78,1422 1181.78,954 1013.78,786 1013.78,762 1097.78,678 v1(1441.78,678)
IO47_DBLTAP: C5.1 IC2.24 R17.2 | length 257.6
  Top w8: C5.1 1317.78,458 1317.78,514 R17.2 1321.78,514 1329.78,522 1505.78,522 IC2.24
N$1: CHG.C R2.1 | length 150.7
  Top w8: CHG.C 241.78,514 285.78,514 337.78,462 R2.1
N$2: LED1.2 R9.1 | length 180
  Top w8: v1(1565.78,2106) 1577.78,2106 1649.78,2034 R9.1
  Bottom w8: LED1.2 1525.78,2150 1565.78,2110 v1(1565.78,2106)
N$3: R2.2 U3.1 | length 727.2
  Top w8: R2.2 437.78,462 465.78,490 465.78,494 473.78,502 v1(537.78,502) ; v1(813.78,938) 813.78,902 825.78,890 U3.1
  Bottom w8: v1(537.78,502) 537.78,662 v1(813.78,938)
N$4: R4.2 U3.5 | length 73.3
  Top w8: R4.2 769.78,962 797.78,962 825.78,990 U3.5
N$6: Q1.1 R11.2 R66.1 | length 178.9
  Top w8: Q1.1 765.78,1310 773.78,1310 833.78,1250 R66.1 R11.2
N$7: IC3.3 Q1.3 | length 155.5
  Top w8: Q1.3 IC3.3
N$8: R8.2 X3.A5 | length 290.6
  Top w8: R8.2 281.78,1030 281.78,950 265.78,934 265.78,854 321.78,798 345.78,798 X3.A5
N$9: R5.2 X3.B5 | length 276.3
  Top w8: v1(297.78,682) 345.78,682 X3.B5 ; R5.2 425.78,662 v1(469.78,662)
  Bottom w8: v1(297.78,682) 317.78,662 v1(469.78,662)
N$10: LED2.2 R13.1 | length 203.9
  Top w8: R13.1 1521.78,1650 v1(1521.78,1694)
  Bottom w8: v1(1521.78,1694) 1521.78,1850 LED2.2
N$11: LED3.2 R14.1 | length 103.9
  Top w8: R14.1 821.78,2050 v1(821.78,2094)
  Bottom w8: v1(821.78,2094) 821.78,2150 LED3.2
N$12: LED4.2 R15.1 | length 103.9
  Top w8: R15.1 821.78,1950 v1(821.78,1906)
  Bottom w8: v1(821.78,1906) 821.78,1850 LED4.2
N$13: LED1.1 LED2.1 LED3.1 LED4.1 Q2.3 | length 1353.6
  Top w8: v1(1025.78,2038) 1033.78,2030 1033.78,2002 Q2.3
  Bottom w8: LED4.1 881.78,1850 881.78,2038 ; LED3.1 881.78,2150 881.78,2038 ; LED2.1 1581.78,1850 1581.78,2038 ; LED1.1 1581.78,2150 1593.78,2138 1593.78,2094 1581.78,2082 1581.78,2038 ; 881.78,2038 v1(1025.78,2038) 1581.78,2038
N$14: D1.C D2.C R16.1 | length 355.2
  Top w8: D2.C D1.C 1433.78,2018 1449.78,2018 R16.1
N$15: Q2.1 R16.2 R18.2 | length 638.7
  Top w8: Q2.1 969.78,2038 1033.78,2102 1033.78,2150 R18.2 1037.78,2150 1101.78,2214 1321.78,2214 1449.78,2086 R16.2
N$17: IC4.6 R19.1 R21.2 | length 615.1
  Top w8: R21.2 1001.78,334 1017.78,350 R19.1 1021.78,350 1065.78,394 1381.78,394 1397.78,378 1397.78,354 1345.78,302 1309.78,302 IC4.6
N$18: FB2.1 U1.10 | length 150.5
  Top w8: U1.10 341.78,238 341.78,122 361.78,102 FB2.1
N$19: FB1.1 U1.9 | length 386.6
  Top w8: U1.9 321.78,238 321.78,142 325.78,138 325.78,66 333.78,58 473.78,58 513.78,98 FB1.1
N$23: J3.6
N$29: J3.12
N$31: J3.14
PCLK: IC2.12 J3.17 | length 512.1
  Top w8: v1(1621.78,1098) 1657.78,1062 1657.78,1046 IC2.12
  Bottom w8: J3.17 1341.78,1422 1341.78,1378 v1(1621.78,1098)
PWDN: J3.8 R6.2 | length 1091.4
  Bottom w8: R6.2 753.78,1482 785.78,1450 885.78,1450 905.78,1430 905.78,1198 1073.78,1030 1097.78,1030 1161.78,1094 1161.78,1422 J3.8
RESET: C4.1 IC2.3 R1.1 SW2.B SW2.B' TP3.P$1 | length 2635.3
  Top w8: SW2.B' 497.78,470 v1(613.78,470) 653.78,470 SW2.B 657.78,474 709.78,474 C4.1 709.78,478 769.78,478 R1.1 ; TP3.P$1 1601.78,1398 v1(1657.78,1398) ; v1(2041.78,1126) 2105.78,1062 2105.78,1046 IC2.3
  Bottom w8: v1(613.78,470) 853.78,470 941.78,558 1041.78,558 1089.78,510 1401.78,510 1949.78,1058 1949.78,1126 ; v1(1657.78,1398) 1929.78,1126 1949.78,1126 ; v1(2041.78,1126) 1949.78,1126
RX: IC2.31
RXD0: IC2.36
SCL: CONN1.4 IC1.C2 IC2.15 J3.5 R3.1 | length 1476.7
  Top w8: IC1.C2 1037.78,1010 1085.78,1058 v1(1085.78,1170) 1085.78,1210 1101.78,1226 1125.78,1226 1177.78,1174 v1(1177.78,878) 1177.78,822 R3.1 1173.78,822 1161.78,810 1101.78,810 CONN1.4 ; v1(1453.78,974) 1505.78,974 IC2.15
  Bottom w8: v1(1085.78,1170) 1125.78,1170 1145.78,1190 1145.78,1346 1105.78,1386 1105.78,1422 J3.5 ; v1(1177.78,878) 1205.78,906 1369.78,906 1437.78,974 v1(1453.78,974)
SD_MODE: R22.1 U1.4 | length 319.3
  Top w8: R22.1 285.78,102 261.78,126 261.78,338 281.78,358 321.78,358 U1.4
SDA: CONN1.3 IC1.C1 IC2.4 J3.3 R3.2 | length 1933.7
  Top w8: IC1.C1 1033.78,990 1049.78,990 1051.78,988 ; v1(1113.78,1198) 1113.78,1050 1051.78,988 ; v1(1117.78,850) 1073.78,850 ; R3.2 1177.78,782 1113.78,782 1101.78,770 CONN1.3 1097.78,770 1077.78,770 1053.78,794 1053.78,826 1073.78,846 1073.78,850 ; v1(1565.78,878) 1909.78,878 2057.78,1026 2057.78,1042 IC2.4 ; 1051.78,988 1073.78,966 1073.78,850
  Bottom w8: J3.3 1065.78,1422 1065.78,1246 v1(1113.78,1198) ; v1(1117.78,850) 1189.78,850 1217.78,878 v1(1565.78,878)
SELECT: IC2.34 IC4.2 R20.2 | length 956.9
  Top w8: v1(1245.78,366) 1245.78,362 1269.78,338 IC4.2 ; v1(1469.78,210) 1509.78,210 1517.78,202 R20.2 ; v1(1897.78,410) 1905.78,402 1905.78,358 IC2.34
  Bottom w8: v1(1245.78,366) 1313.78,366 v1(1469.78,210) 1469.78,214 1701.78,214 v1(1897.78,410)
STROBE: D1.A J3.1 | length 539.4
  Bottom w8: J3.1 1025.78,1426 1025.78,1554 1301.78,1830 D1.A
TX: IC2.32
TXD0: IC2.37
VBAT: C3.1 IC1.A3 Q3.3 U3.3 X1.2 | length 949.5
  Top w12: Q3.3 561.78,714 561.78,726 573.78,738 573.78,1014 X1.2 577.78,1018 633.78,1074 889.78,1074 945.78,1018 961.78,1018 965.78,1014 ; U3.3 905.78,890 917.78,890 957.78,930 C3.1 965.78,930 965.78,1014 ; IC1.A3 989.78,1030 981.78,1030 965.78,1014
VBUS: CHG.A D4.A Q3.1 R12.2 U3.4 X3.A4B9 X3.B4A9 | length 1666.1
  Top w12: CHG.A 181.78,518 189.78,518 217.78,546 265.78,546 ; v2(265.78,654) 265.78,546 ; X3.B4A9 349.78,658 373.78,658 389.78,674 389.78,690 v2@397.78,698 ; X3.A4B9 349.78,842 381.78,842 v2(397.78,826) ; R12.2 365.78,526 301.78,526 281.78,546 265.78,546 ; v2(397.78,706) v2@397.78,698 ; Q3.1 525.78,638 525.78,678 ; D4.A 529.78,770 525.78,766 525.78,698 ; U3.4 901.78,994 881.78,994 845.78,1030 777.78,1030 593.78,846 593.78,694 577.78,678 525.78,678 ; v2@397.78,698 525.78,698 ; 525.78,678 525.78,698
  Bottom w12: v2(265.78,654) 265.78,694 285.78,714 393.78,714 v2(397.78,706) v2(397.78,826)
VHI: C6.1 D4.C Q3.2 R7.2 U2.1 | length 498.2
  Top w12: Q3.2 601.78,638 601.78,650 657.78,706 C6.1 ; D4.C 673.78,770 673.78,718 665.78,710 C6.1 ; U2.1 729.78,650 U2.1@729.78,670 ; R7.2 917.78,650 877.78,690 749.78,690 U2.1@729.78,670 ; C6.1 677.78,714 717.78,674 725.78,674 U2.1@729.78,670
VO+: C19.1 FB1.2 J2.2 | length 724.7
  Top w8: FB1.2 589.78,102 801.78,102 849.78,150 J2.2 853.78,150 853.78,314 825.78,342 673.78,342 617.78,398 C19.1
VO-: C18.1 FB2.2 J2.1 | length 508.3
  Top w8: FB2.2 441.78,102 489.78,150 673.78,150 ; C18.1 617.78,298 617.78,270 673.78,214 673.78,150 ; J2.1 673.78,150
VSYNC: IC2.23 J3.7 | length 1116.3
  Top w8: v1(1125.78,1470) 1125.78,1400 1125.78,1310 1365.78,1070 1365.78,702 1489.78,578 1505.78,578 IC2.23
  Bottom w8: v1(1125.78,1470) 1141.78,1454 1141.78,1426 J3.7
WS: IC2.33 IC4.1 U1.14 | length 1656.6
  Top w8: U1.14 413.78,290 445.78,290 v1(453.78,282) ; IC4.1 1309.78,338 1341.78,338 v1(1369.78,366) ; v1(1857.78,410) 1857.78,358 IC2.33
  Bottom w8: v1(453.78,282) 477.78,282 589.78,394 1341.78,394 v1(1369.78,366) 1813.78,366 v1(1857.78,410)
XVCLK: IC2.19 J3.13 | length 762.3
  Top w8: v1(1413.78,990) 1413.78,854 1489.78,778 1505.78,778 IC2.19
  Bottom w8: J3.13 1261.78,1422 1261.78,1142 v1(1413.78,990)
pads on no net: IC1.A2 IC1.B2 IC1.B3 IC1.C3 IC2.16 IC2.26 IC2.28 IC2.29 IC2.30 J3.M1 J3.M2 R3.3 R3.4 R3.5 R3.6 U1.5 U1.6 U1.12 U1.13 U2.4 U$34.1 U$35.1 X3.A8 X3.B8 X3.M1 X3.M2 X3.M3 X3.M4

## Keep-outs
Keep-Out Layer:
  the board outline again, w0

## Silkscreen, mask and mechanical layers (free items; w line width, h text height)
Bottom Overlay:
  drawing of 18 lines, arcs and shapes, not listed
Dimension:
  the board outline again, w0
tPlace:
  text "SDA" at 1976.14,1115.48 h27.2 r90
  text "SCL" at 1752.38,1068.93 h34
  text "#13" at 323.37,1012.09 h34
  text "I2C" at 958.27,722.53 h34 r90
  text "ESP32S3" at 1315.35,662.62 h34 r90
  text "Boot" at 916.71,582.09 h34
  text "Reset" at 519.71,577.09 h34
  text "Neo" at 1239.88,543.93 h34
  text "Chg" at 262.6,515.99 h32.3
Unrouted:
  lines w0: 346.35,720.47 346.35,759.84

## Dimensions
301.78,300 to 326.78,750 on tFinish
151.78,1105 to 576.78,1060 on tFinish
151.78,1115 to 1351.78,1150 on tFinish
151.78,565 to 1151.78,350 on tFinish
2006.78,370 to 2096.78,375 on tFinish
201.78,400 to 301.78,400 on tFinish
251.78,1100 to 2051.78,1125 on tFinish
151.78,920 to 2151.78,500 on tFinish
2051.78,375 to 2051.78,1125 on tFinish
961.78,300 to 1101.78,1200 on tFinish

## Text inside footprints (layer, text, board x,y; h text height)
J3: tDocu "Lower-contact" at 976.19,1519.69 h13.6 r180